# EAGLE board Clap Sensor Switch (EAGLE 7.4.0)
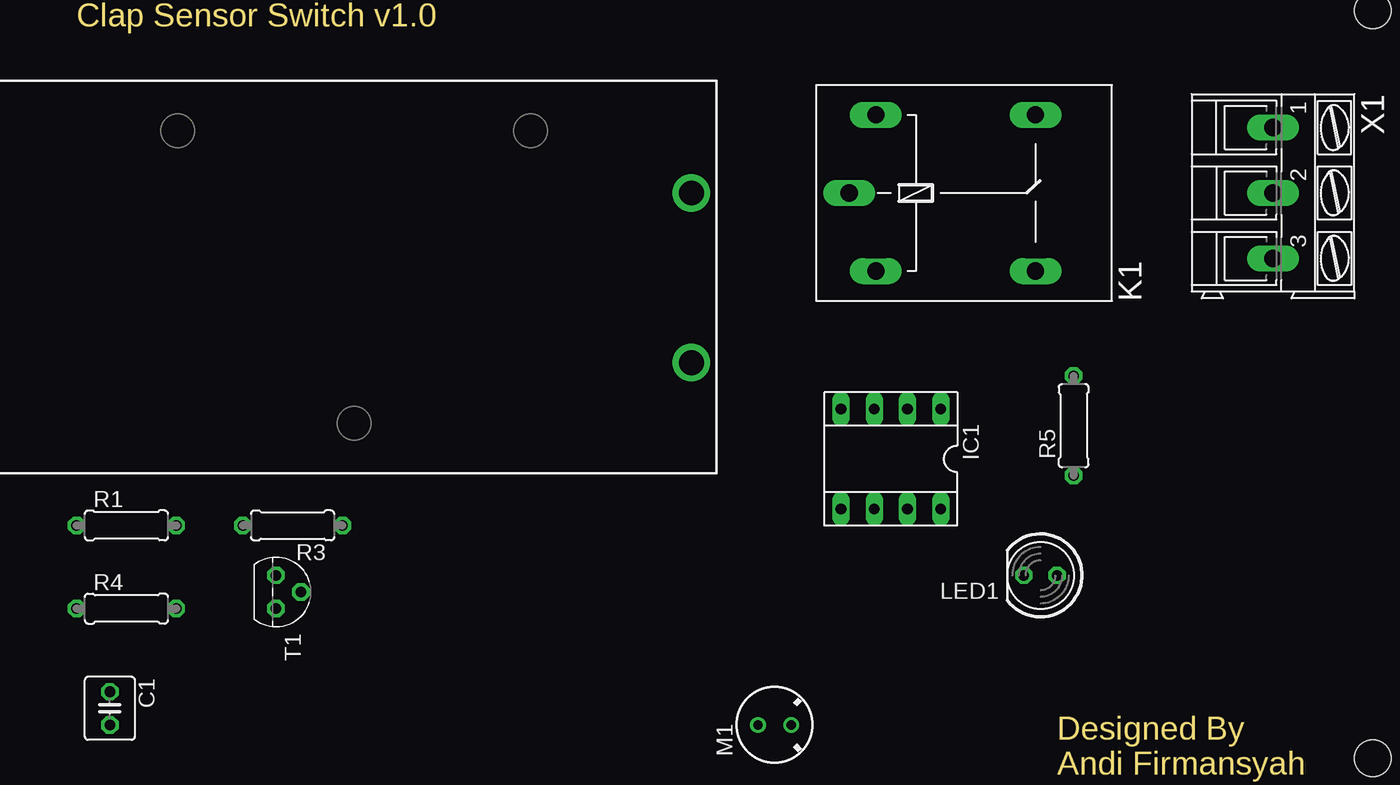
[diagram p0: board, top side]
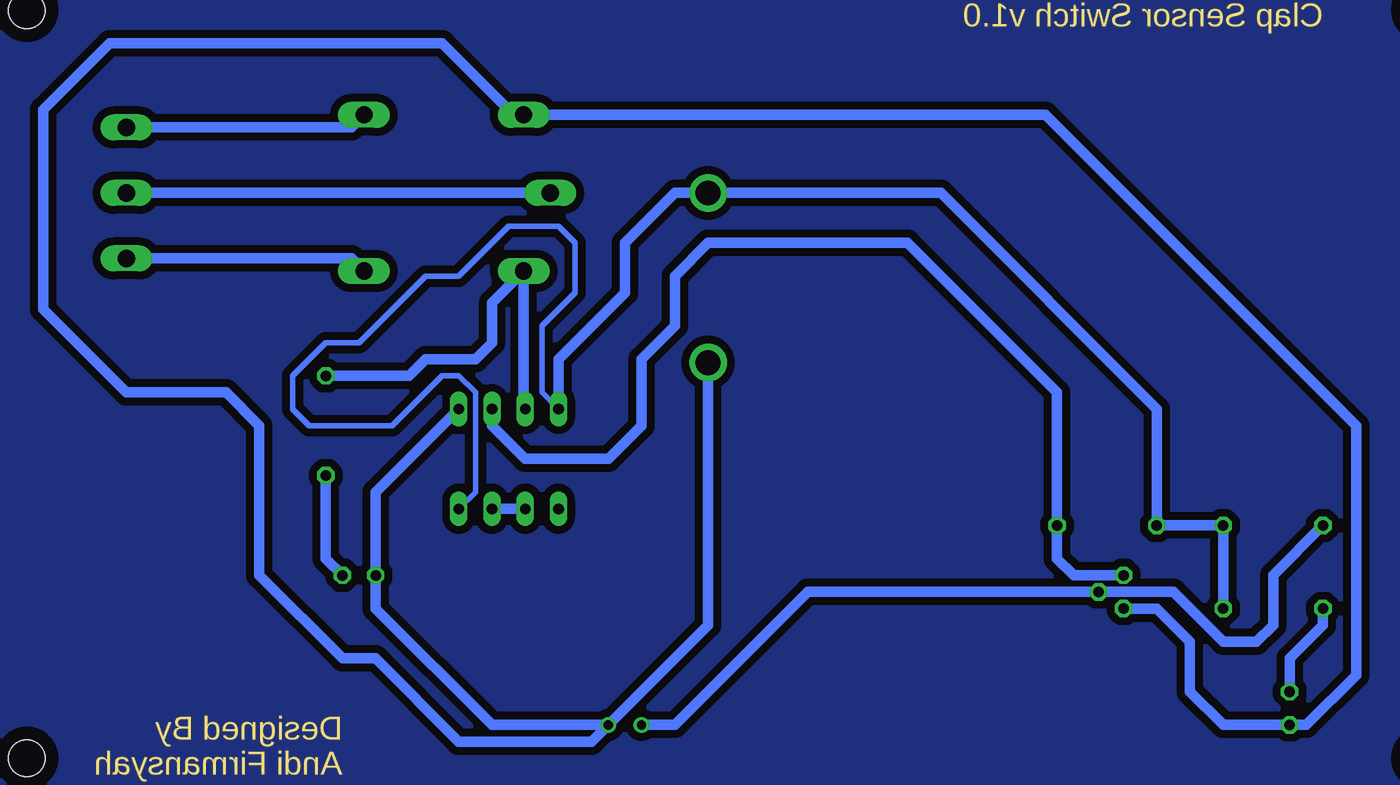
[diagram p1: board, bottom side, seen from below]

No outline drawn. Coordinates in mm, seen from the top.
Copper layers (1*16): Top 0.035mm / dielectric 1.5mm / Bottom 0.035mm
Design rules "default": minimum track width 10mil, minimum drill 24mil, track to track 8mil, track to pad 8mil, pad to pad 8mil, via to via 8mil, smd to smd 8mil, copper to edge 40mil, drill to drill 8mil, minimum pad ring 10mil, minimum via ring 8mil, stop-mask expansion 4mil, vias tented up to drill 0mil, thermal gap 10mil
Holes 2.8 mm at 6.35,-13.97 113.03,-13.97 113.03,43.18 6.35,43.18

## Footprints (pad centres in the part's own frame; a part is rotated, then mirrored left to right if it is on the bottom)
BATTCON_9V = drill 1.905: + 0,0; - 0,-12.954
C025-040X050 = drill 0.813 octagon: 1 -1.27,0; 2 1.27,0
SOCKET-08 = drill 0.813 long: 1 -3.81,-3.81; 2 -1.27,-3.81; 3 1.27,-3.81; 4 3.81,-3.81; 5 3.81,3.81; 6 1.27,3.81; 7 -1.27,3.81; 8 -3.81,3.81
G5LE = drill 1.321 long: 1 -7.493,-5.969; 2 -7.493,5.969; O 4.699,5.969; P -9.525,0; S 4.699,-5.969
LED5MM = drill 0.813 octagon: A -1.27,0; K 1.27,0
F6050AP = drill 0.7 pad 1.2: 1 0,1.27; 2 0,-1.27
0207/7 = drill 0.813 octagon: 1 -3.81,0; 2 3.81,0
TO92 = drill 0.813 octagon: 1 1.27,0; 2 0,1.905; 3 -1.27,0
AK300/3 = drill 1.321 long: 1 -5.004,0; 2 0,0; 3 5.004,0

## Placement (x,y rotation side)
BT1  9V  [BATTCON_9V]  60.96,29.21 0 top
C1  10μF  [C025-040X050]  16.51,-10.16 270 top
IC1  [SOCKET-08]  76.2,8.89 180 top
K1  G5L  [G5LE]  82.55,29.21 0 top
LED1  [LED5MM]  87.63,0 180 top
M1  ELECTRET_MICROPHON-F6050AP  [F6050AP]  67.31,-11.43 90 top
R1  47kΩ  [0207/7]  17.78,3.81 0 top
R3  1kΩ  [0207/7]  30.48,3.81 180 top
R4  100kΩ  [0207/7]  17.78,-2.54 0 top
R5  220Ω  [0207/7]  90.17,11.43 90 top
T1  BC547  [TO92]  29.21,-1.27 270 top
X1  [AK300/3]  105.41,29.21 270 top

## Library data of the parts
BT1 = SparkFun-Batteries; PROD_ID: BATT-10855
C1 = rcl
IC1 = ic-package
K1 = relay; OC_FARNELL: unknown; OC_NEWARK: unknown
LED1 = led
M1 = microphone
R1 R3-R5 = resistor
T1 = transistor
X1 = con-ptr500; OC_FARNELL: unknown; OC_NEWARK: unknown

## Nets
GND: BT1.- C1.2 IC1.1 K1.2 LED1.K M1.2 T1.1
N$1: IC1.6 IC1.7
N$2: LED1.A R5.1
N$3: IC1.3 K1.1 R5.2
N$4: M1.1 R1.1 T1.2
N$5: IC1.2 R3.1 T1.3
N$6: K1.S X1.3
N$7: C1.1 R4.1
N$8: K1.O X1.1
N$9: K1.P X1.2
N$10: BT1.+ IC1.4 IC1.8 R1.2 R3.2 R4.2

## Tracks (layer width: path | path; a pad name or v marks a point on that pad's centre or on a via)
GND
  Bottom 0.813: T1.1 26.67,-2.54 24.13,-5.08 24.13,-8.89 21.59,-11.43 C1.2 15.24,-11.43 11.43,-7.62 11.43,11.43 35.18,35.18 K1.2 75.82,35.18 81.28,40.64 106.68,40.64 111.76,35.56 111.76,20.32 105.41,13.97 97.79,13.97 95.25,11.43 95.25,0 88.9,-6.35 86.36,-6.35 80.01,-12.7 69.85,-12.7 M1.2 | M1.2 77.47,-11.43 86.36,-2.54 LED1.K 86.36,6.35 IC1.1 | BT1.- 60.96,-3.81 M1.2
N$1
  Bottom 0.813: IC1.7 IC1.6
N$2
  Bottom 0.813: LED1.A 90.17,1.27 R5.1
N$3
  Bottom 0.813: IC1.3 75.06,12.83 K1.1 77.47,20.83 77.47,17.78 78.74,16.51 82.55,16.51 83.82,15.24 R5.2
N$4
  Bottom 0.813: R1.1 17.78,0 17.78,-3.81 19.05,-5.08 21.59,-5.08 25.4,-1.27 T1.2 53.34,-1.27 63.5,-11.43 M1.1
N$5
  Bottom 0.813: T1.3 33.02,0 34.29,1.27 R3.1 34.29,13.97 45.72,25.4 60.96,25.4 63.5,22.86 63.5,19.05 66.04,16.51 66.04,11.43 68.58,8.89 74.93,8.89 77.47,11.43 IC1.2
N$6
  Bottom 0.813: X1.3 88.21,24.21 K1.S
N$7
  Bottom 0.813: C1.1 16.51,-6.35 13.97,-3.81 R4.1
N$8
  Bottom 0.813: X1.1 88.21,34.21 K1.O
N$9
  Bottom 0.813: X1.2 K1.P
N$10
  Bottom 0.406: IC1.8 78.74,6.35 78.74,13.97 80.01,15.24 81.28,15.24 85.09,11.43 91.44,11.43 92.71,12.7 92.71,15.24 90.17,17.78 87.63,17.78 82.55,22.86 80.01,22.86 76.2,26.67 72.39,26.67 71.12,25.4 71.12,21.59 73.66,19.05 73.66,13.97 IC1.4
  Bottom 0.813: R4.2 R1.2 R3.2 26.67,12.7 43.18,29.21 BT1.+ 63.5,29.21 67.31,25.4 67.31,21.59 72.39,16.51 IC1.4
S$1
  pour Bottom (isolate 0.61): 12.7,-17.78 6.35,-17.78 2.54,-13.97 2.54,43.18 6.35,46.99 113.03,46.99 116.84,43.18 116.84,-13.97 113.03,-17.78

## Text on the board
Dimension: Clap Sensor Switch v1.0 | Designed By / Andi Firmansyah